# EAGLE board LSM9DS0_Breakout_Board-panel4 (EAGLE 7.1.0), part 1 of 2
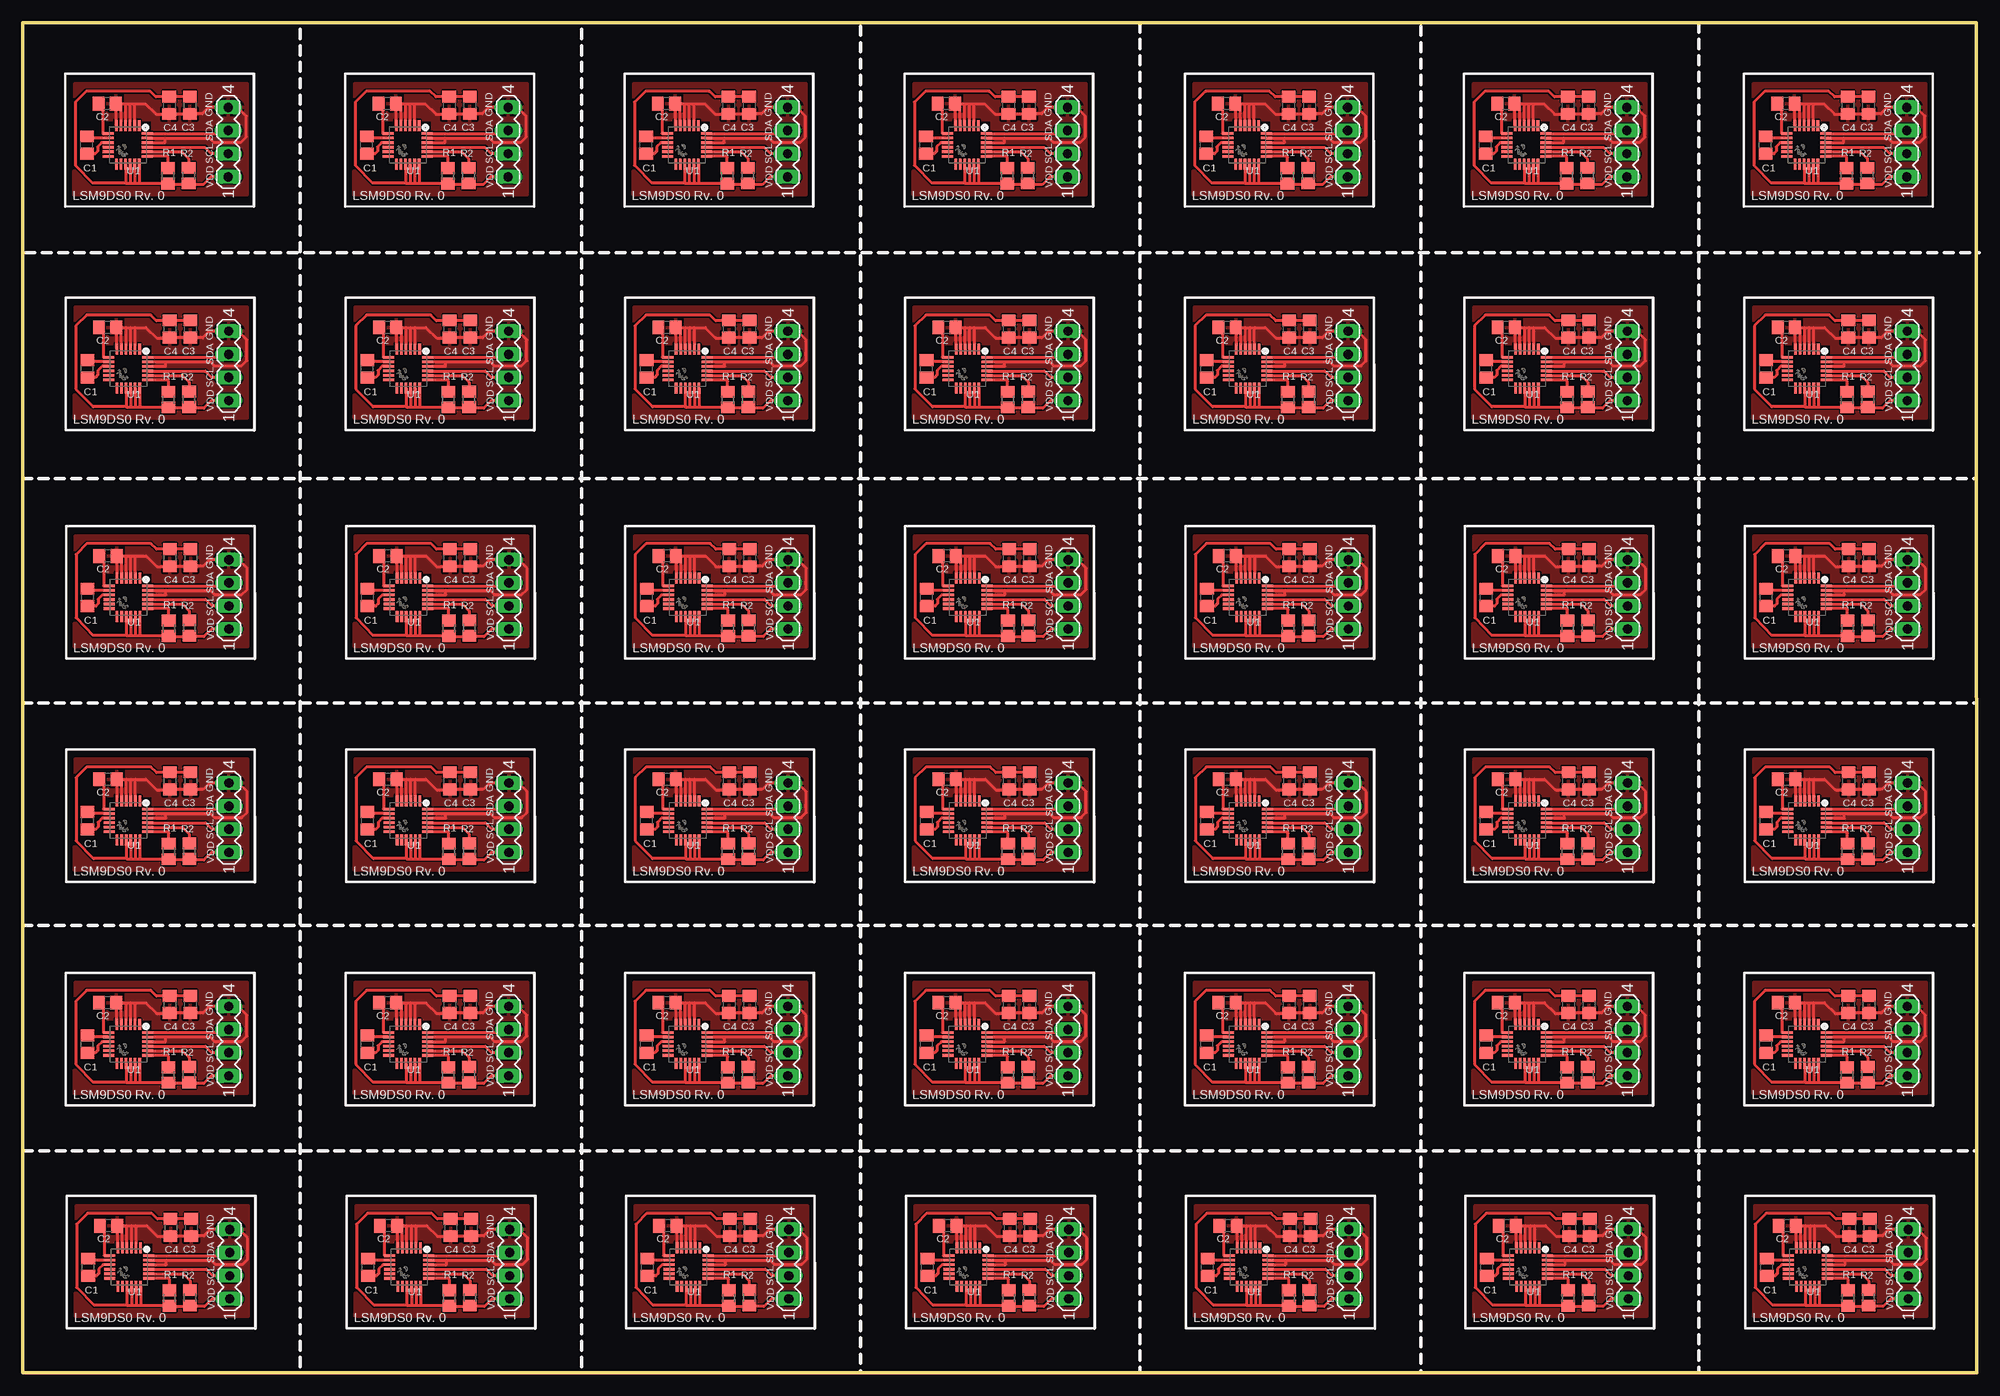
[diagram p0: board, top side]

Size 214.5 x 148.23 mm. Coordinates in mm from the lower left corner, seen from the top.
Outline: 0,148.23 214.48,148.23 214.5,0 0,0 0,148.23
Copper layers (1*16): Top 0.035559375mm / dielectric 1.501140625mm / Bottom 0.035559375mm
Design rules "4pcb-33board *": minimum track width 8mil, minimum drill 15mil, track to track 6mil, track to pad 6mil, pad to pad 6mil, via to via 6mil, smd to smd 6mil, copper to edge 10mil, drill to drill 10mil, minimum pad ring 10mil, minimum via ring 8mil, stop-mask expansion 4mil, vias tented up to drill 0mil, thermal gap 10mil
Net classes: 1 RFSIG: width 0.457 mm, clearance 0.205 mm to class 0, clearance 0.205 mm
bRestrict: area 10.2,10.1 to 13.2,13.1; area 10.1,34.5 to 13.1,37.6; area 10.1,59.1 to 13.1,62.2; area 10.1,83.6 to 13.1,86.7; area 10.1,108.7 to 13.1,111.8; area 10.1,133.2 to 13,136.3; area 40.9,10.1 to 43.9,13.1; area 40.8,34.5 to 43.8,37.6; area 40.9,59.1 to 43.8,62.2; area 40.9,83.6 to 43.8,86.7; area 40.8,108.7 to 43.8,111.8; area 40.8,133.2 to 43.7,136.3; 30 more areas

## Footprints (pad centres in the part's own frame; a part is rotated, then mirrored left to right if it is on the bottom)
C0805 = smd 1.3 x 1.5: 1 -0.95,0; 2 0.95,0
R0805 = smd 1.3 x 1.5: 1 -0.85,0; 2 0.85,0
MA04-1 = drill 1.016 long: 1 -3.81,0; 2 -1.27,0; 3 1.27,0; 4 3.81,0
LGA-24 = smd 1.208 x 0.29: 1 -2.129,1.25; 2 -2.129,0.75; 3 -2.129,0.25; 4 -2.129,-0.25; 5 -2.129,-0.75; 6 -2.129,-1.25; 13 2.129,-1.25; 14 2.129,-0.75; 15 2.129,-0.25; 16 2.129,0.25; 17 2.129,0.75; 18 2.129,1.25 | smd 0.29 x 1.208: 7 -1.25,-2.129; 8 -0.75,-2.129; 9 -0.25,-2.129; 10 0.25,-2.129; 11 0.75,-2.129; 12 1.25,-2.129; 19 1.25,2.129; 20 0.75,2.129; 21 0.25,2.129; 22 -0.25,2.129; 23 -0.75,2.129; 24 -1.25,2.129

## Placement (x,y rotation side)
C1  0.22uF  [C0805]  7.19,11.61 90 top
C2  4.7uF  [C0805]  9.42,16.15 180 top
C3  10uF  [C0805]  18.49,15.98 270 top
C4  100nF  [C0805]  16.23,15.98 270 top
C5  100nF  [C0805]  16.13,40.46 270 top
C6  10uF  [C0805]  18.39,40.46 270 top
C7  0.22uF  [C0805]  7.09,36.09 90 top
C8  4.7uF  [C0805]  9.32,40.64 180 top
C9  100nF  [C0805]  16.15,65 270 top
C10  10uF  [C0805]  18.41,65 270 top
C11  0.22uF  [C0805]  7.11,60.63 90 top
C12  4.7uF  [C0805]  9.35,65.18 180 top
C13  100nF  [C0805]  46.96,15.98 270 top
C14  10uF  [C0805]  49.23,15.98 270 top
C15  0.22uF  [C0805]  37.92,11.61 90 top
C16  4.7uF  [C0805]  40.16,16.15 180 top
C17  100nF  [C0805]  16.15,89.51 270 top
C18  10uF  [C0805]  18.41,89.51 270 top
C19  0.22uF  [C0805]  7.11,85.14 90 top
C20  4.7uF  [C0805]  9.35,89.69 180 top
C21  100nF  [C0805]  16.13,114.6 270 top
C22  10uF  [C0805]  18.39,114.6 270 top
C23  0.22uF  [C0805]  7.09,110.24 90 top
C24  4.7uF  [C0805]  9.32,114.78 180 top
C25  100nF  [C0805]  46.86,40.46 270 top
C26  10uF  [C0805]  49.12,40.46 270 top
C27  0.22uF  [C0805]  37.82,36.09 90 top
C28  4.7uF  [C0805]  40.06,40.64 180 top
C29  100nF  [C0805]  46.89,65 270 top
C30  10uF  [C0805]  49.15,65 270 top
C31  0.22uF  [C0805]  37.85,60.63 90 top
C32  4.7uF  [C0805]  40.08,65.18 180 top
C33  100nF  [C0805]  46.89,89.51 270 top
C34  10uF  [C0805]  49.15,89.51 270 top
C35  0.22uF  [C0805]  37.85,85.14 90 top
C36  4.7uF  [C0805]  40.08,89.69 180 top
C37  100nF  [C0805]  46.86,114.6 270 top
C38  10uF  [C0805]  49.12,114.6 270 top
C39  0.22uF  [C0805]  37.82,110.24 90 top
C40  4.7uF  [C0805]  40.06,114.78 180 top
C41  100nF  [C0805]  46.81,139.17 270 top
C42  10uF  [C0805]  49.07,139.17 270 top
C43  0.22uF  [C0805]  37.77,134.8 90 top
C44  4.7uF  [C0805]  40.01,139.34 180 top
C45  100nF  [C0805]  77.62,15.98 270 top
C46  10uF  [C0805]  79.88,15.98 270 top
C47  0.22uF  [C0805]  68.58,11.61 90 top
C48  4.7uF  [C0805]  70.82,16.15 180 top
C49  100nF  [C0805]  77.52,40.46 270 top
C50  10uF  [C0805]  79.78,40.46 270 top
C51  0.22uF  [C0805]  68.48,36.09 90 top
C52  4.7uF  [C0805]  70.71,40.64 180 top
C53  100nF  [C0805]  77.55,65 270 top
C54  10uF  [C0805]  79.81,65 270 top
C55  0.22uF  [C0805]  68.5,60.63 90 top
C56  4.7uF  [C0805]  70.74,65.18 180 top
C57  100nF  [C0805]  77.55,89.51 270 top
C58  10uF  [C0805]  79.81,89.51 270 top
C59  0.22uF  [C0805]  68.5,85.14 90 top
C60  4.7uF  [C0805]  70.74,89.69 180 top
C61  100nF  [C0805]  16.08,139.17 270 top
C62  10uF  [C0805]  18.34,139.17 270 top
C63  0.22uF  [C0805]  7.04,134.8 90 top
C64  4.7uF  [C0805]  9.27,139.34 180 top
C65  100nF  [C0805]  77.52,114.6 270 top
C66  10uF  [C0805]  79.78,114.6 270 top
C67  0.22uF  [C0805]  68.48,110.24 90 top
C68  4.7uF  [C0805]  70.71,114.78 180 top
C69  100nF  [C0805]  77.47,139.17 270 top
C70  10uF  [C0805]  79.73,139.17 270 top
C71  0.22uF  [C0805]  68.43,134.8 90 top
C72  4.7uF  [C0805]  70.66,139.34 180 top
C73  100nF  [C0805]  108.36,15.98 270 top
C74  10uF  [C0805]  110.62,15.98 270 top
C75  0.22uF  [C0805]  99.31,11.61 90 top
C76  4.7uF  [C0805]  101.55,16.15 180 top
C77  100nF  [C0805]  108.25,40.46 270 top
C78  10uF  [C0805]  110.52,40.46 270 top
C79  0.22uF  [C0805]  99.21,36.09 90 top
C80  4.7uF  [C0805]  101.45,40.64 180 top
C81  100nF  [C0805]  108.28,65 270 top
C82  10uF  [C0805]  110.54,65 270 top
C83  0.22uF  [C0805]  99.24,60.63 90 top
C84  4.7uF  [C0805]  101.47,65.18 180 top
C85  100nF  [C0805]  108.28,89.51 270 top
C86  10uF  [C0805]  110.54,89.51 270 top
C87  0.22uF  [C0805]  99.24,85.14 90 top
C88  4.7uF  [C0805]  101.47,89.69 180 top
C89  100nF  [C0805]  108.25,114.6 270 top
C90  10uF  [C0805]  110.52,114.6 270 top
C91  0.22uF  [C0805]  99.21,110.24 90 top
C92  4.7uF  [C0805]  101.45,114.78 180 top
C93  100nF  [C0805]  108.2,139.17 270 top
C94  10uF  [C0805]  110.46,139.17 270 top
C95  0.22uF  [C0805]  99.16,134.8 90 top
C96  4.7uF  [C0805]  101.4,139.34 180 top
C97  100nF  [C0805]  139.12,15.98 270 top
C98  10uF  [C0805]  141.38,15.98 270 top
C99  0.22uF  [C0805]  130.07,11.61 90 top
C100  4.7uF  [C0805]  132.31,16.15 180 top
C101  100nF  [C0805]  139.01,40.46 270 top
C102  10uF  [C0805]  141.27,40.46 270 top
C103  0.22uF  [C0805]  129.97,36.09 90 top
C104  4.7uF  [C0805]  132.21,40.64 180 top
C105  100nF  [C0805]  139.04,65 270 top
C106  10uF  [C0805]  141.3,65 270 top
C107  0.22uF  [C0805]  130,60.63 90 top
C108  4.7uF  [C0805]  132.23,65.18 180 top
C109  100nF  [C0805]  139.04,89.51 270 top
C110  10uF  [C0805]  141.3,89.51 270 top
C111  0.22uF  [C0805]  130,85.14 90 top
C112  4.7uF  [C0805]  132.23,89.69 180 top
C113  100nF  [C0805]  139.01,114.6 270 top
C114  10uF  [C0805]  141.27,114.6 270 top
C115  0.22uF  [C0805]  129.97,110.24 90 top
C116  4.7uF  [C0805]  132.21,114.78 180 top
C117  100nF  [C0805]  138.96,139.17 270 top
C118  10uF  [C0805]  141.22,139.17 270 top
C119  0.22uF  [C0805]  129.92,134.8 90 top
C120  4.7uF  [C0805]  132.16,139.34 180 top
C121  100nF  [C0805]  169.77,15.98 270 top
C122  10uF  [C0805]  172.03,15.98 270 top
C123  0.22uF  [C0805]  160.73,11.61 90 top
C124  4.7uF  [C0805]  162.97,16.15 180 top
C125  100nF  [C0805]  169.67,40.46 270 top
C126  10uF  [C0805]  171.93,40.46 270 top
C127  0.22uF  [C0805]  160.63,36.09 90 top
C128  4.7uF  [C0805]  162.86,40.64 180 top
C129  100nF  [C0805]  169.7,65 270 top
C130  10uF  [C0805]  171.96,65 270 top
C131  0.22uF  [C0805]  160.66,60.63 90 top
C132  4.7uF  [C0805]  162.89,65.18 180 top
C133  100nF  [C0805]  169.7,89.51 270 top
C134  10uF  [C0805]  171.96,89.51 270 top
C135  0.22uF  [C0805]  160.66,85.14 90 top
C136  4.7uF  [C0805]  162.89,89.69 180 top
C137  100nF  [C0805]  169.67,114.6 270 top
C138  10uF  [C0805]  171.93,114.6 270 top
C139  0.22uF  [C0805]  160.63,110.24 90 top
C140  4.7uF  [C0805]  162.86,114.78 180 top
C141  100nF  [C0805]  169.62,139.17 270 top
C142  10uF  [C0805]  171.88,139.17 270 top
C143  0.22uF  [C0805]  160.58,134.8 90 top
C144  4.7uF  [C0805]  162.81,139.34 180 top
C145  100nF  [C0805]  200.51,15.98 270 top
C146  10uF  [C0805]  202.77,15.98 270 top
C147  0.22uF  [C0805]  191.47,11.61 90 top
C148  4.7uF  [C0805]  193.7,16.15 180 top
C149  100nF  [C0805]  200.41,40.46 270 top
C150  10uF  [C0805]  202.67,40.46 270 top
C151  0.22uF  [C0805]  191.36,36.09 90 top
C152  4.7uF  [C0805]  193.6,40.64 180 top
C153  100nF  [C0805]  200.43,65 270 top
C154  10uF  [C0805]  202.69,65 270 top
C155  0.22uF  [C0805]  191.39,60.63 90 top
C156  4.7uF  [C0805]  193.62,65.18 180 top
C157  100nF  [C0805]  200.43,89.51 270 top
C158  10uF  [C0805]  202.69,89.51 270 top
C159  0.22uF  [C0805]  191.39,85.14 90 top
C160  4.7uF  [C0805]  193.62,89.69 180 top
C161  100nF  [C0805]  200.41,114.6 270 top
C162  10uF  [C0805]  202.67,114.6 270 top
C163  0.22uF  [C0805]  191.36,110.24 90 top
C164  4.7uF  [C0805]  193.6,114.78 180 top
C165  100nF  [C0805]  200.36,139.17 270 top
C166  10uF  [C0805]  202.62,139.17 270 top
C167  0.22uF  [C0805]  191.31,134.8 90 top
C168  4.7uF  [C0805]  193.55,139.34 180 top
R1  10k  [R0805]  16.1,8.23 270 top
R2  10k  [R0805]  18.36,8.25 270 top
R3  10k  [R0805]  16,32.72 270 top
R4  10k  [R0805]  18.26,32.74 270 top
R5  10k  [R0805]  16.03,57.25 270 top
R6  10k  [R0805]  18.29,57.28 270 top
R7  10k  [R0805]  46.84,8.23 270 top
R8  10k  [R0805]  49.1,8.25 270 top
R9  10k  [R0805]  16.03,81.76 270 top
R10  10k  [R0805]  18.29,81.79 270 top
R11  10k  [R0805]  16,106.86 270 top
R12  10k  [R0805]  18.26,106.88 270 top
R13  10k  [R0805]  46.74,32.72 270 top
R14  10k  [R0805]  49,32.74 270 top
R15  10k  [R0805]  46.76,57.25 270 top
R16  10k  [R0805]  49.02,57.28 270 top
R17  10k  [R0805]  46.76,81.76 270 top
R18  10k  [R0805]  49.02,81.79 270 top
R19  10k  [R0805]  46.74,106.86 270 top
R20  10k  [R0805]  49,106.88 270 top
R21  10k  [R0805]  46.69,131.42 270 top
R22  10k  [R0805]  48.95,131.44 270 top
R23  10k  [R0805]  77.5,8.23 270 top
R24  10k  [R0805]  79.76,8.25 270 top
R25  10k  [R0805]  77.39,32.72 270 top
R26  10k  [R0805]  79.65,32.74 270 top
R27  10k  [R0805]  77.42,57.25 270 top
R28  10k  [R0805]  79.68,57.28 270 top
R29  10k  [R0805]  77.42,81.76 270 top
R30  10k  [R0805]  79.68,81.79 270 top
R31  10k  [R0805]  15.95,131.42 270 top
R32  10k  [R0805]  18.21,131.44 270 top
R33  10k  [R0805]  77.39,106.86 270 top
R34  10k  [R0805]  79.65,106.88 270 top
R35  10k  [R0805]  77.34,131.42 270 top
R36  10k  [R0805]  79.6,131.44 270 top
R37  10k  [R0805]  108.23,8.23 270 top
R38  10k  [R0805]  110.49,8.25 270 top
R39  10k  [R0805]  108.13,32.72 270 top
R40  10k  [R0805]  110.39,32.74 270 top
R41  10k  [R0805]  108.15,57.25 270 top
R42  10k  [R0805]  110.41,57.28 270 top
R43  10k  [R0805]  108.15,81.76 270 top
R44  10k  [R0805]  110.41,81.79 270 top
R45  10k  [R0805]  108.13,106.86 270 top
R46  10k  [R0805]  110.39,106.88 270 top
R47  10k  [R0805]  108.08,131.42 270 top
R48  10k  [R0805]  110.34,131.44 270 top
R49  10k  [R0805]  138.99,8.23 270 top
R50  10k  [R0805]  141.25,8.25 270 top
R51  10k  [R0805]  138.89,32.72 270 top
R52  10k  [R0805]  141.15,32.74 270 top
R53  10k  [R0805]  138.91,57.25 270 top
R54  10k  [R0805]  141.17,57.28 270 top
R55  10k  [R0805]  138.91,81.76 270 top
R56  10k  [R0805]  141.17,81.79 270 top
R57  10k  [R0805]  138.89,106.86 270 top
R58  10k  [R0805]  141.15,106.88 270 top
R59  10k  [R0805]  138.84,131.42 270 top
R60  10k  [R0805]  141.1,131.44 270 top
R61  10k  [R0805]  169.65,8.23 270 top
R62  10k  [R0805]  171.91,8.25 270 top
R63  10k  [R0805]  169.54,32.72 270 top
R64  10k  [R0805]  171.81,32.74 270 top
R65  10k  [R0805]  169.57,57.25 270 top
R66  10k  [R0805]  171.83,57.28 270 top
R67  10k  [R0805]  169.57,81.76 270 top
R68  10k  [R0805]  171.83,81.79 270 top
R69  10k  [R0805]  169.54,106.86 270 top
R70  10k  [R0805]  171.81,106.88 270 top
R71  10k  [R0805]  169.49,131.42 270 top
R72  10k  [R0805]  171.75,131.44 270 top
R73  10k  [R0805]  200.38,8.23 270 top
R74  10k  [R0805]  202.64,8.25 270 top
R75  10k  [R0805]  200.28,32.72 270 top
R76  10k  [R0805]  202.54,32.74 270 top
R77  10k  [R0805]  200.3,57.25 270 top
R78  10k  [R0805]  202.56,57.28 270 top
R79  10k  [R0805]  200.3,81.76 270 top
R80  10k  [R0805]  202.56,81.79 270 top
R81  10k  [R0805]  200.28,106.86 270 top
R82  10k  [R0805]  202.54,106.88 270 top
R83  10k  [R0805]  200.23,131.42 270 top
R84  10k  [R0805]  202.49,131.44 270 top
SV1  JP1  [MA04-1]  22.71,11.94 90 top
SV2  JP1  [MA04-1]  22.61,36.42 90 top
SV3  JP1  [MA04-1]  22.63,60.96 90 top
SV4  JP1  [MA04-1]  53.44,11.94 90 top
SV5  JP1  [MA04-1]  22.63,85.47 90 top
SV6  JP1  [MA04-1]  22.61,110.57 90 top
SV7  JP1  [MA04-1]  53.34,36.42 90 top
SV8  JP1  [MA04-1]  53.37,60.96 90 top
SV9  JP1  [MA04-1]  53.37,85.47 90 top
SV10  JP1  [MA04-1]  53.34,110.57 90 top
SV11  JP1  [MA04-1]  53.29,135.13 90 top
SV12  JP1  [MA04-1]  84.1,11.94 90 top
SV13  JP1  [MA04-1]  84,36.42 90 top
SV14  JP1  [MA04-1]  84.02,60.96 90 top
SV15  JP1  [MA04-1]  84.02,85.47 90 top
SV16  JP1  [MA04-1]  22.56,135.13 90 top
SV17  JP1  [MA04-1]  84,110.57 90 top
SV18  JP1  [MA04-1]  83.95,135.13 90 top
SV19  JP1  [MA04-1]  114.83,11.94 90 top
SV20  JP1  [MA04-1]  114.73,36.42 90 top
SV21  JP1  [MA04-1]  114.76,60.96 90 top
SV22  JP1  [MA04-1]  114.76,85.47 90 top
SV23  JP1  [MA04-1]  114.73,110.57 90 top
SV24  JP1  [MA04-1]  114.68,135.13 90 top
SV25  JP1  [MA04-1]  145.59,11.94 90 top
SV26  JP1  [MA04-1]  145.49,36.42 90 top
SV27  JP1  [MA04-1]  145.52,60.96 90 top
SV28  JP1  [MA04-1]  145.52,85.47 90 top
SV29  JP1  [MA04-1]  145.49,110.57 90 top
SV30  JP1  [MA04-1]  145.44,135.13 90 top
SV31  JP1  [MA04-1]  176.25,11.94 90 top
SV32  JP1  [MA04-1]  176.15,36.42 90 top
SV33  JP1  [MA04-1]  176.17,60.96 90 top
SV34  JP1  [MA04-1]  176.17,85.47 90 top
SV35  JP1  [MA04-1]  176.15,110.57 90 top
SV36  JP1  [MA04-1]  176.1,135.13 90 top
SV37  JP1  [MA04-1]  206.98,11.94 90 top
SV38  JP1  [MA04-1]  206.88,36.42 90 top
SV39  JP1  [MA04-1]  206.91,60.96 90 top
SV40  JP1  [MA04-1]  206.91,85.47 90 top
SV41  JP1  [MA04-1]  206.88,110.57 90 top
SV42  JP1  [MA04-1]  206.83,135.13 90 top
U1  LSM9DS0  [LGA-24]  11.68,11.63 270 top
U2  LSM9DS0  [LGA-24]  11.58,36.12 270 top
U3  LSM9DS0  [LGA-24]  11.61,60.66 270 top
U4  LSM9DS0  [LGA-24]  42.42,11.63 270 top
U5  LSM9DS0  [LGA-24]  11.61,85.17 270 top
U6  LSM9DS0  [LGA-24]  11.58,110.26 270 top
U7  LSM9DS0  [LGA-24]  42.32,36.12 270 top
U8  LSM9DS0  [LGA-24]  42.34,60.66 270 top
U9  LSM9DS0  [LGA-24]  42.34,85.17 270 top
U10  LSM9DS0  [LGA-24]  42.32,110.26 270 top
U11  LSM9DS0  [LGA-24]  42.27,134.82 270 top
U12  LSM9DS0  [LGA-24]  73.08,11.63 270 top
U13  LSM9DS0  [LGA-24]  72.97,36.12 270 top
U14  LSM9DS0  [LGA-24]  73,60.66 270 top
U15  LSM9DS0  [LGA-24]  73,85.17 270 top
U16  LSM9DS0  [LGA-24]  11.53,134.82 270 top
U17  LSM9DS0  [LGA-24]  72.97,110.26 270 top
U18  LSM9DS0  [LGA-24]  72.92,134.82 270 top
U19  LSM9DS0  [LGA-24]  103.81,11.63 270 top
U20  LSM9DS0  [LGA-24]  103.71,36.12 270 top
U21  LSM9DS0  [LGA-24]  103.73,60.66 270 top
U22  LSM9DS0  [LGA-24]  103.73,85.17 270 top
U23  LSM9DS0  [LGA-24]  103.71,110.26 270 top
U24  LSM9DS0  [LGA-24]  103.66,134.82 270 top
U25  LSM9DS0  [LGA-24]  134.57,11.63 270 top
U26  LSM9DS0  [LGA-24]  134.47,36.12 270 top
U27  LSM9DS0  [LGA-24]  134.49,60.66 270 top
U28  LSM9DS0  [LGA-24]  134.49,85.17 270 top
U29  LSM9DS0  [LGA-24]  134.47,110.26 270 top
U30  LSM9DS0  [LGA-24]  134.42,134.82 270 top
U31  LSM9DS0  [LGA-24]  165.23,11.63 270 top
U32  LSM9DS0  [LGA-24]  165.13,36.12 270 top
U33  LSM9DS0  [LGA-24]  165.15,60.66 270 top
U34  LSM9DS0  [LGA-24]  165.15,85.17 270 top
U35  LSM9DS0  [LGA-24]  165.13,110.26 270 top
U36  LSM9DS0  [LGA-24]  165.07,134.82 270 top
U37  LSM9DS0  [LGA-24]  195.96,11.63 270 top
U38  LSM9DS0  [LGA-24]  195.86,36.12 270 top
U39  LSM9DS0  [LGA-24]  195.88,60.66 270 top
U40  LSM9DS0  [LGA-24]  195.88,85.17 270 top
U41  LSM9DS0  [LGA-24]  195.86,110.26 270 top
U42  LSM9DS0  [LGA-24]  195.81,134.82 270 top

## Library data of the parts
C1-C168 = rcl
R1-R84 = resistor
SV1-SV42 = con-lstb; OC_FARNELL: unknown; OC_NEWARK: unknown
U1-U42 = Controller

## Nets
GND: C2.1 C3.2 C4.2 SV1.4 U1.2 U1.3 U1.4 U1.5 U1.6 U1.22 U1.23
GND1: C5.2 C6.2 C8.1 SV2.4 U2.2 U2.3 U2.4 U2.5 U2.6 U2.22 U2.23
GND2: C9.2 C10.2 C12.1 SV3.4 U3.2 U3.3 U3.4 U3.5 U3.6 U3.22 U3.23
GND3: C13.2 C14.2 C16.1 SV4.4 U4.2 U4.3 U4.4 U4.5 U4.6 U4.22 U4.23
GND4: C17.2 C18.2 C20.1 SV5.4 U5.2 U5.3 U5.4 U5.5 U5.6 U5.22 U5.23
GND5: C21.2 C22.2 C24.1 SV6.4 U6.2 U6.3 U6.4 U6.5 U6.6 U6.22 U6.23
GND6: C25.2 C26.2 C28.1 SV7.4 U7.2 U7.3 U7.4 U7.5 U7.6 U7.22 U7.23
GND7: C29.2 C30.2 C32.1 SV8.4 U8.2 U8.3 U8.4 U8.5 U8.6 U8.22 U8.23
GND8: C33.2 C34.2 C36.1 SV9.4 U9.2 U9.3 U9.4 U9.5 U9.6 U9.22 U9.23
GND9: C37.2 C38.2 C40.1 SV10.4 U10.2 U10.3 U10.4 U10.5 U10.6 U10.22 U10.23
GND10: C41.2 C42.2 C44.1 SV11.4 U11.2 U11.3 U11.4 U11.5 U11.6 U11.22 U11.23
GND11: C45.2 C46.2 C48.1 SV12.4 U12.2 U12.3 U12.4 U12.5 U12.6 U12.22 U12.23
GND12: C49.2 C50.2 C52.1 SV13.4 U13.2 U13.3 U13.4 U13.5 U13.6 U13.22 U13.23
GND13: C53.2 C54.2 C56.1 SV14.4 U14.2 U14.3 U14.4 U14.5 U14.6 U14.22 U14.23
GND14: C57.2 C58.2 C60.1 SV15.4 U15.2 U15.3 U15.4 U15.5 U15.6 U15.22 U15.23
GND15: C61.2 C62.2 C64.1 SV16.4 U16.2 U16.3 U16.4 U16.5 U16.6 U16.22 U16.23
GND16: C65.2 C66.2 C68.1 SV17.4 U17.2 U17.3 U17.4 U17.5 U17.6 U17.22 U17.23
GND17: C69.2 C70.2 C72.1 SV18.4 U18.2 U18.3 U18.4 U18.5 U18.6 U18.22 U18.23
GND18: C73.2 C74.2 C76.1 SV19.4 U19.2 U19.3 U19.4 U19.5 U19.6 U19.22 U19.23
GND19: C77.2 C78.2 C80.1 SV20.4 U20.2 U20.3 U20.4 U20.5 U20.6 U20.22 U20.23
GND20: C81.2 C82.2 C84.1 SV21.4 U21.2 U21.3 U21.4 U21.5 U21.6 U21.22 U21.23
GND21: C85.2 C86.2 C88.1 SV22.4 U22.2 U22.3 U22.4 U22.5 U22.6 U22.22 U22.23
GND22: C89.2 C90.2 C92.1 SV23.4 U23.2 U23.3 U23.4 U23.5 U23.6 U23.22 U23.23
GND23: C93.2 C94.2 C96.1 SV24.4 U24.2 U24.3 U24.4 U24.5 U24.6 U24.22 U24.23
GND24: C97.2 C98.2 C100.1 SV25.4 U25.2 U25.3 U25.4 U25.5 U25.6 U25.22 U25.23
GND25: C101.2 C102.2 C104.1 SV26.4 U26.2 U26.3 U26.4 U26.5 U26.6 U26.22 U26.23
GND26: C105.2 C106.2 C108.1 SV27.4 U27.2 U27.3 U27.4 U27.5 U27.6 U27.22 U27.23
GND27: C109.2 C110.2 C112.1 SV28.4 U28.2 U28.3 U28.4 U28.5 U28.6 U28.22 U28.23
GND28: C113.2 C114.2 C116.1 SV29.4 U29.2 U29.3 U29.4 U29.5 U29.6 U29.22 U29.23
GND29: C117.2 C118.2 C120.1 SV30.4 U30.2 U30.3 U30.4 U30.5 U30.6 U30.22 U30.23
GND30: C121.2 C122.2 C124.1 SV31.4 U31.2 U31.3 U31.4 U31.5 U31.6 U31.22 U31.23
GND31: C125.2 C126.2 C128.1 SV32.4 U32.2 U32.3 U32.4 U32.5 U32.6 U32.22 U32.23
GND32: C129.2 C130.2 C132.1 SV33.4 U33.2 U33.3 U33.4 U33.5 U33.6 U33.22 U33.23
GND33: C133.2 C134.2 C136.1 SV34.4 U34.2 U34.3 U34.4 U34.5 U34.6 U34.22 U34.23
GND34: C137.2 C138.2 C140.1 SV35.4 U35.2 U35.3 U35.4 U35.5 U35.6 U35.22 U35.23
GND35: C141.2 C142.2 C144.1 SV36.4 U36.2 U36.3 U36.4 U36.5 U36.6 U36.22 U36.23
GND36: C145.2 C146.2 C148.1 SV37.4 U37.2 U37.3 U37.4 U37.5 U37.6 U37.22 U37.23
GND37: C149.2 C150.2 C152.1 SV38.4 U38.2 U38.3 U38.4 U38.5 U38.6 U38.22 U38.23
GND38: C153.2 C154.2 C156.1 SV39.4 U39.2 U39.3 U39.4 U39.5 U39.6 U39.22 U39.23
GND39: C157.2 C158.2 C160.1 SV40.4 U40.2 U40.3 U40.4 U40.5 U40.6 U40.22 U40.23
GND40: C161.2 C162.2 C164.1 SV41.4 U41.2 U41.3 U41.4 U41.5 U41.6 U41.22 U41.23
GND41: C165.2 C166.2 C168.1 SV42.4 U42.2 U42.3 U42.4 U42.5 U42.6 U42.22 U42.23
N$1: C8.2 U2.7
N$2: C7.2 U2.8
N$3: C7.1 U2.9
N$4: R3.1 U2.19
N$5: R4.1 U2.20
N$6: C12.2 U3.7
N$7: C11.2 U3.8
N$8: C11.1 U3.9
N$9: R5.1 U3.19
N$10: R6.1 U3.20
N$11: C16.2 U4.7
N$12: C15.2 U4.8
N$13: C15.1 U4.9
N$14: R7.1 U4.19
N$15: R8.1 U4.20
N$16: C20.2 U5.7
N$17: C19.2 U5.8
N$18: C19.1 U5.9
N$19: R9.1 U5.19
N$20: C2.2 U1.7
N$21: C1.2 U1.8
N$22: C1.1 U1.9
N$23: R1.1 U1.19
N$24: R2.1 U1.20
N$25: R10.1 U5.20
N$26: C24.2 U6.7
N$27: C23.2 U6.8
N$28: C23.1 U6.9
N$29: R11.1 U6.19
N$30: R12.1 U6.20
N$31: C28.2 U7.7
N$32: C27.2 U7.8
N$33: C27.1 U7.9
N$34: R13.1 U7.19
N$35: R14.1 U7.20
N$36: C32.2 U8.7
N$37: C31.2 U8.8
N$38: C31.1 U8.9
N$39: R15.1 U8.19
N$40: R16.1 U8.20
N$41: C36.2 U9.7
N$42: C35.2 U9.8
N$43: C35.1 U9.9
N$44: R17.1 U9.19
N$45: R18.1 U9.20
N$46: C40.2 U10.7
N$47: C39.2 U10.8
N$48: C39.1 U10.9
N$49: R19.1 U10.19
N$50: R20.1 U10.20
N$51: C44.2 U11.7
N$52: C43.2 U11.8
N$53: C43.1 U11.9
N$54: R21.1 U11.19
N$55: R22.1 U11.20
N$56: C48.2 U12.7
N$57: C47.2 U12.8
N$58: C47.1 U12.9
N$59: R23.1 U12.19
N$60: R24.1 U12.20
N$61: C52.2 U13.7
N$62: C51.2 U13.8
N$63: C51.1 U13.9
N$64: R25.1 U13.19
N$65: R26.1 U13.20
N$66: C56.2 U14.7
N$67: C55.2 U14.8
N$68: C55.1 U14.9
N$69: R27.1 U14.19
N$70: R28.1 U14.20
N$71: C60.2 U15.7
N$72: C59.2 U15.8
N$73: C59.1 U15.9
N$74: R29.1 U15.19
N$75: R30.1 U15.20
N$76: C64.2 U16.7
N$77: C63.2 U16.8
N$78: C63.1 U16.9
N$79: R31.1 U16.19
N$80: R32.1 U16.20
N$81: C68.2 U17.7
N$82: C67.2 U17.8
N$83: C67.1 U17.9
N$84: R33.1 U17.19
N$85: R34.1 U17.20
N$86: C72.2 U18.7
N$87: C71.2 U18.8
N$88: C71.1 U18.9
N$89: R35.1 U18.19
N$90: R36.1 U18.20
N$91: C76.2 U19.7
N$92: C75.2 U19.8
N$93: C75.1 U19.9
N$94: R37.1 U19.19
N$95: R38.1 U19.20
N$96: C80.2 U20.7
N$97: C79.2 U20.8
N$98: C79.1 U20.9
N$99: R39.1 U20.19
N$100: R40.1 U20.20
N$101: C84.2 U21.7
N$102: C83.2 U21.8
N$103: C83.1 U21.9
N$104: R41.1 U21.19
N$105: R42.1 U21.20
N$106: C88.2 U22.7
N$107: C87.2 U22.8
N$108: C87.1 U22.9
N$109: R43.1 U22.19
N$110: R44.1 U22.20
N$111: C92.2 U23.7
N$112: C91.2 U23.8
N$113: C91.1 U23.9
N$114: R45.1 U23.19
N$115: R46.1 U23.20
N$116: C96.2 U24.7
N$117: C95.2 U24.8
N$118: C95.1 U24.9
N$119: R47.1 U24.19
N$120: R48.1 U24.20
N$121: C100.2 U25.7
N$122: C99.2 U25.8
N$123: C99.1 U25.9
N$124: R49.1 U25.19
N$125: R50.1 U25.20
N$126: C104.2 U26.7
N$127: C103.2 U26.8
N$128: C103.1 U26.9
N$129: R51.1 U26.19
N$130: R52.1 U26.20
N$131: C108.2 U27.7
N$132: C107.2 U27.8
N$133: C107.1 U27.9
N$134: R53.1 U27.19
N$135: R54.1 U27.20
N$136: C112.2 U28.7
N$137: C111.2 U28.8
N$138: C111.1 U28.9
N$139: R55.1 U28.19
N$140: R56.1 U28.20
N$141: C116.2 U29.7
N$142: C115.2 U29.8
N$143: C115.1 U29.9
N$144: R57.1 U29.19
N$145: R58.1 U29.20
N$146: C120.2 U30.7
N$147: C119.2 U30.8
N$148: C119.1 U30.9
N$149: R59.1 U30.19
N$150: R60.1 U30.20
N$151: C124.2 U31.7
N$152: C123.2 U31.8
N$153: C123.1 U31.9
N$154: R61.1 U31.19
N$155: R62.1 U31.20
N$156: C128.2 U32.7
N$157: C127.2 U32.8
N$158: C127.1 U32.9
N$159: R63.1 U32.19
N$160: R64.1 U32.20
N$161: C132.2 U33.7
N$162: C131.2 U33.8
N$163: C131.1 U33.9
N$164: R65.1 U33.19
N$165: R66.1 U33.20
N$166: C136.2 U34.7
N$167: C135.2 U34.8
N$168: C135.1 U34.9
N$169: R67.1 U34.19
N$170: R68.1 U34.20
N$171: C140.2 U35.7
N$172: C139.2 U35.8
N$173: C139.1 U35.9
N$174: R69.1 U35.19
N$175: R70.1 U35.20
N$176: C144.2 U36.7
N$177: C143.2 U36.8
N$178: C143.1 U36.9
N$179: R71.1 U36.19
N$180: R72.1 U36.20
N$181: C148.2 U37.7
N$182: C147.2 U37.8
N$183: C147.1 U37.9
N$184: R73.1 U37.19
N$185: R74.1 U37.20
N$186: C152.2 U38.7
N$187: C151.2 U38.8
N$188: C151.1 U38.9
N$189: R75.1 U38.19
N$190: R76.1 U38.20
N$191: C156.2 U39.7
N$192: C155.2 U39.8
N$193: C155.1 U39.9
N$194: R77.1 U39.19
N$195: R78.1 U39.20
N$196: C160.2 U40.7
N$197: C159.2 U40.8
N$198: C159.1 U40.9
N$199: R79.1 U40.19
N$200: R80.1 U40.20
N$201: C164.2 U41.7
N$202: C163.2 U41.8
N$203: C163.1 U41.9
N$204: R81.1 U41.19
N$205: R82.1 U41.20
N$206: C168.2 U42.7
N$207: C167.2 U42.8
N$208: C167.1 U42.9
N$209: R83.1 U42.19
N$210: R84.1 U42.20
SCL: SV1.2 U1.21
SCL1: SV2.2 U2.21
SCL2: SV3.2 U3.21
SCL3: SV4.2 U4.21
SCL4: SV5.2 U5.21
SCL5: SV6.2 U6.21
SCL6: SV7.2 U7.21
SCL7: SV8.2 U8.21
SCL8: SV9.2 U9.21
SCL9: SV10.2 U10.21
SCL10: SV11.2 U11.21
SCL11: SV12.2 U12.21
SCL12: SV13.2 U13.21
SCL13: SV14.2 U14.21
SCL14: SV15.2 U15.21
SCL15: SV16.2 U16.21
SCL16: SV17.2 U17.21
SCL17: SV18.2 U18.21
SCL18: SV19.2 U19.21
SCL19: SV20.2 U20.21
SCL20: SV21.2 U21.21
SCL21: SV22.2 U22.21
SCL22: SV23.2 U23.21
SCL23: SV24.2 U24.21
SCL24: SV25.2 U25.21
SCL25: SV26.2 U26.21
SCL26: SV27.2 U27.21
SCL27: SV28.2 U28.21
SCL28: SV29.2 U29.21
SCL29: SV30.2 U30.21
SCL30: SV31.2 U31.21
SCL31: SV32.2 U32.21
SCL32: SV33.2 U33.21
SCL33: SV34.2 U34.21
SCL34: SV35.2 U35.21
SCL35: SV36.2 U36.21
SCL36: SV37.2 U37.21
SCL37: SV38.2 U38.21
SCL38: SV39.2 U39.21
SCL39: SV40.2 U40.21
SCL40: SV41.2 U41.21
SCL41: SV42.2 U42.21
SDA: SV1.3 U1.24
SDA1: SV2.3 U2.24
SDA2: SV3.3 U3.24
SDA3: SV4.3 U4.24
SDA4: SV5.3 U5.24
SDA5: SV6.3 U6.24
SDA6: SV7.3 U7.24
SDA7: SV8.3 U8.24
SDA8: SV9.3 U9.24
SDA9: SV10.3 U10.24
SDA10: SV11.3 U11.24
SDA11: SV12.3 U12.24
SDA12: SV13.3 U13.24
SDA13: SV14.3 U14.24
SDA14: SV15.3 U15.24
SDA15: SV16.3 U16.24
SDA16: SV17.3 U17.24
SDA17: SV18.3 U18.24
SDA18: SV19.3 U19.24
SDA19: SV20.3 U20.24
SDA20: SV21.3 U21.24
SDA21: SV22.3 U22.24
SDA22: SV23.3 U23.24
SDA23: SV24.3 U24.24
SDA24: SV25.3 U25.24
SDA25: SV26.3 U26.24
SDA26: SV27.3 U27.24
SDA27: SV28.3 U28.24
SDA28: SV29.3 U29.24
SDA29: SV30.3 U30.24
SDA30: SV31.3 U31.24
SDA31: SV32.3 U32.24
SDA32: SV33.3 U33.24
SDA33: SV34.3 U34.24
SDA34: SV35.3 U35.24
SDA35: SV36.3 U36.24
SDA36: SV37.3 U37.24
SDA37: SV38.3 U38.24
SDA38: SV39.3 U39.24
SDA39: SV40.3 U40.24
SDA40: SV41.3 U41.24
SDA41: SV42.3 U42.24
VDD: C3.1 C4.1 R1.2 R2.2 SV1.1 U1.15 U1.16 U1.17 U1.18
VDD1: C5.1 C6.1 R3.2 R4.2 SV2.1 U2.15 U2.16 U2.17 U2.18
VDD2: C9.1 C10.1 R5.2 R6.2 SV3.1 U3.15 U3.16 U3.17 U3.18
VDD3: C13.1 C14.1 R7.2 R8.2 SV4.1 U4.15 U4.16 U4.17 U4.18
VDD4: C17.1 C18.1 R9.2 R10.2 SV5.1 U5.15 U5.16 U5.17 U5.18
VDD5: C21.1 C22.1 R11.2 R12.2 SV6.1 U6.15 U6.16 U6.17 U6.18
VDD6: C25.1 C26.1 R13.2 R14.2 SV7.1 U7.15 U7.16 U7.17 U7.18
VDD7: C29.1 C30.1 R15.2 R16.2 SV8.1 U8.15 U8.16 U8.17 U8.18
VDD8: C33.1 C34.1 R17.2 R18.2 SV9.1 U9.15 U9.16 U9.17 U9.18
VDD9: C37.1 C38.1 R19.2 R20.2 SV10.1 U10.15 U10.16 U10.17 U10.18
VDD10: C41.1 C42.1 R21.2 R22.2 SV11.1 U11.15 U11.16 U11.17 U11.18
VDD11: C45.1 C46.1 R23.2 R24.2 SV12.1 U12.15 U12.16 U12.17 U12.18
VDD12: C49.1 C50.1 R25.2 R26.2 SV13.1 U13.15 U13.16 U13.17 U13.18
VDD13: C53.1 C54.1 R27.2 R28.2 SV14.1 U14.15 U14.16 U14.17 U14.18
VDD14: C57.1 C58.1 R29.2 R30.2 SV15.1 U15.15 U15.16 U15.17 U15.18
VDD15: C61.1 C62.1 R31.2 R32.2 SV16.1 U16.15 U16.16 U16.17 U16.18
VDD16: C65.1 C66.1 R33.2 R34.2 SV17.1 U17.15 U17.16 U17.17 U17.18
VDD17: C69.1 C70.1 R35.2 R36.2 SV18.1 U18.15 U18.16 U18.17 U18.18
VDD18: C73.1 C74.1 R37.2 R38.2 SV19.1 U19.15 U19.16 U19.17 U19.18
VDD19: C77.1 C78.1 R39.2 R40.2 SV20.1 U20.15 U20.16 U20.17 U20.18
VDD20: C81.1 C82.1 R41.2 R42.2 SV21.1 U21.15 U21.16 U21.17 U21.18
VDD21: C85.1 C86.1 R43.2 R44.2 SV22.1 U22.15 U22.16 U22.17 U22.18
VDD22: C89.1 C90.1 R45.2 R46.2 SV23.1 U23.15 U23.16 U23.17 U23.18
VDD23: C93.1 C94.1 R47.2 R48.2 SV24.1 U24.15 U24.16 U24.17 U24.18
VDD24: C97.1 C98.1 R49.2 R50.2 SV25.1 U25.15 U25.16 U25.17 U25.18
VDD25: C101.1 C102.1 R51.2 R52.2 SV26.1 U26.15 U26.16 U26.17 U26.18
VDD26: C105.1 C106.1 R53.2 R54.2 SV27.1 U27.15 U27.16 U27.17 U27.18
VDD27: C109.1 C110.1 R55.2 R56.2 SV28.1 U28.15 U28.16 U28.17 U28.18
VDD28: C113.1 C114.1 R57.2 R58.2 SV29.1 U29.15 U29.16 U29.17 U29.18
VDD29: C117.1 C118.1 R59.2 R60.2 SV30.1 U30.15 U30.16 U30.17 U30.18
VDD30: C121.1 C122.1 R61.2 R62.2 SV31.1 U31.15 U31.16 U31.17 U31.18
VDD31: C125.1 C126.1 R63.2 R64.2 SV32.1 U32.15 U32.16 U32.17 U32.18
VDD32: C129.1 C130.1 R65.2 R66.2 SV33.1 U33.15 U33.16 U33.17 U33.18
VDD33: C133.1 C134.1 R67.2 R68.2 SV34.1 U34.15 U34.16 U34.17 U34.18
VDD34: C137.1 C138.1 R69.2 R70.2 SV35.1 U35.15 U35.16 U35.17 U35.18
VDD35: C141.1 C142.1 R71.2 R72.2 SV36.1 U36.15 U36.16 U36.17 U36.18
VDD36: C145.1 C146.1 R73.2 R74.2 SV37.1 U37.15 U37.16 U37.17 U37.18
VDD37: C149.1 C150.1 R75.2 R76.2 SV38.1 U38.15 U38.16 U38.17 U38.18
VDD38: C153.1 C154.1 R77.2 R78.2 SV39.1 U39.15 U39.16 U39.17 U39.18
VDD39: C157.1 C158.1 R79.2 R80.2 SV40.1 U40.15 U40.16 U40.17 U40.18
VDD40: C161.1 C162.1 R81.2 R82.2 SV41.1 U41.15 U41.16 U41.17 U41.18
VDD41: C165.1 C166.1 R83.2 R84.2 SV42.1 U42.15 U42.16 U42.17 U42.18

## Tracks (layer width: path | path; a pad name or v marks a point on that pad's centre or on a via)
GND
  Top 0.305: U1.6 10.43,16.09 C2.1 10.93,16.15 | 10.93,16.15 11.43,16.15 | 11.43,16.15 11.93,16.15 | 11.93,16.15 12.43,16.15 | 12.43,16.15 13.61,16.15 14.78,14.99 16.22,14.99 C4.2 C3.2 19.86,15.04 20.57,15.75 SV1.4 23.75,15.75 24.69,14.81 24.69,12.5 24.13,11.94 21.11,11.94 20.66,12.38 15.77,12.38 | U1.4 11.43,16.15 | U1.3 11.93,16.15 | U1.5 10.93,16.15 | U1.2 12.43,16.15 | U1.23 15.77,12.38 | U1.22 13.97,11.89 15.77,11.89 15.77,12.38
  pour Top: 5.74,6.2 24.77,6.2 24.77,18.36 5.84,18.36 5.84,14.38 14.4,14.38 14.4,8.74 5.74,8.74
GND1
  Top 0.305: U2.6 10.33,40.58 C8.1 10.83,40.64 | 10.83,40.64 11.33,40.64 | 11.33,40.64 11.83,40.64 | 11.83,40.64 12.33,40.64 | 12.33,40.64 13.51,40.64 14.68,39.47 16.11,39.47 C5.2 C6.2 18.4,39.52 19.76,39.52 20.47,40.23 SV2.4 23.65,40.23 24.59,39.29 24.59,36.98 24.03,36.42 21.01,36.42 20.56,36.87 15.67,36.87 | U2.4 11.33,40.64 | U2.3 11.83,40.64 | U2.5 10.83,40.64 | U2.2 12.33,40.64 | U2.23 15.67,36.87 | U2.22 13.86,36.37 15.67,36.37 15.67,36.87
  pour Top: 5.64,30.68 24.66,30.68 24.66,42.85 5.74,42.85 5.74,38.86 14.3,38.86 14.3,33.22 5.64,33.22
GND2
  Top 0.305: U3.6 10.36,65.12 C12.1 10.86,65.18 | 10.86,65.18 11.36,65.18 | 11.36,65.18 11.86,65.18 | 11.86,65.18 12.36,65.18 | 12.36,65.18 13.54,65.18 14.71,64.01 16.14,64.01 C9.2 C10.2 19.79,64.06 20.5,64.77 SV3.4 23.67,64.77 24.61,63.83 24.61,61.52 24.05,60.96 21.03,60.96 20.59,61.41 15.7,61.41 | U3.4 11.36,65.18 | U3.3 11.86,65.18 | U3.5 10.86,65.18 | U3.2 12.36,65.18 | U3.23 15.7,61.41 | U3.22 13.89,60.91 15.7,60.91 15.7,61.41
  pour Top: 5.66,55.22 24.69,55.22 24.69,67.39 5.77,67.39 5.77,63.4 14.33,63.4 14.33,57.76 5.66,57.76
GND3
  Top 0.305: U4.6 41.17,16.09 C16.1 41.67,16.15 | 41.67,16.15 42.17,16.15 | 42.17,16.15 42.67,16.15 | 42.67,16.15 43.17,16.15 | 43.17,16.15 44.35,16.15 45.52,14.99 46.95,14.99 C13.2 C14.2 50.6,15.04 51.31,15.75 SV4.4 54.48,15.75 55.42,14.81 55.42,12.5 54.86,11.94 51.84,11.94 51.4,12.38 46.51,12.38 | U4.4 42.17,16.15 | U4.3 42.67,16.15 | U4.5 41.67,16.15 | U4.2 43.17,16.15 | U4.23 46.51,12.38 | U4.22 44.7,11.89 46.51,11.89 46.51,12.38
  pour Top: 36.47,6.2 55.5,6.2 55.5,18.36 36.58,18.36 36.58,14.38 45.14,14.38 45.14,8.74 36.47,8.74
GND4
  Top 0.305: U5.6 10.36,89.63 C20.1 10.86,89.69 | 10.86,89.69 11.36,89.69 | 11.36,89.69 11.86,89.69 | 11.86,89.69 12.36,89.69 | 12.36,89.69 13.54,89.69 14.71,88.52 16.14,88.52 C17.2 C18.2 19.79,88.57 20.5,89.28 SV5.4 23.67,89.28 24.61,88.34 24.61,86.03 24.05,85.47 21.03,85.47 20.59,85.92 15.7,85.92 | U5.4 11.36,89.69 | U5.3 11.86,89.69 | U5.5 10.86,89.69 | U5.2 12.36,89.69 | U5.23 15.7,85.92 | U5.22 13.89,85.42 15.7,85.42 15.7,85.92
  pour Top: 5.66,79.73 24.69,79.73 24.69,91.9 5.77,91.9 5.77,87.91 14.33,87.91 14.33,82.27 5.66,82.27
GND5
  Top 0.305: U6.6 10.33,114.72 C24.1 10.83,114.78 | 10.83,114.78 11.33,114.78 | 11.33,114.78 11.83,114.78 | 11.83,114.78 12.33,114.78 | 12.33,114.78 13.51,114.78 14.68,113.61 16.11,113.61 C21.2 C22.2 18.4,113.67 19.76,113.67 20.47,114.38 SV6.4 23.65,114.38 24.59,113.44 24.59,111.13 24.03,110.57 21.01,110.57 20.56,111.01 15.67,111.01 | U6.4 11.33,114.78 | U6.3 11.83,114.78 | U6.5 10.83,114.78 | U6.2 12.33,114.78 | U6.23 15.67,111.01 | U6.22 13.86,110.52 15.67,110.52 15.67,111.01
  pour Top: 5.64,104.83 24.66,104.83 24.66,116.99 5.74,116.99 5.74,113 14.3,113 14.3,107.37 5.64,107.37
GND6
  Top 0.305: U7.6 41.07,40.58 C28.1 41.57,40.64 | 41.57,40.64 42.07,40.64 | 42.07,40.64 42.57,40.64 | 42.57,40.64 43.07,40.64 | 43.07,40.64 44.25,40.64 45.42,39.47 46.85,39.47 C25.2 C26.2 50.5,39.52 51.21,40.23 SV7.4 54.38,40.23 55.32,39.29 55.32,36.98 54.76,36.42 51.74,36.42 51.29,36.87 46.41,36.87 | U7.4 42.07,40.64 | U7.3 42.57,40.64 | U7.5 41.57,40.64 | U7.2 43.07,40.64 | U7.23 46.41,36.87 | U7.22 44.6,36.37 46.41,36.37 46.41,36.87
  pour Top: 36.37,30.68 55.4,30.68 55.4,42.85 36.47,42.85 36.47,38.86 45.03,38.86 45.03,33.22 36.37,33.22
GND7
  Top 0.305: U8.6 41.09,65.12 C32.1 41.59,65.18 | 41.59,65.18 42.09,65.18 | 42.09,65.18 42.59,65.18 | 42.59,65.18 43.09,65.18 | 43.09,65.18 44.27,65.18 45.44,64.01 46.87,64.01 C29.2 C30.2 49.16,64.06 50.52,64.06 51.23,64.77 SV8.4 54.41,64.77 55.35,63.83 55.35,61.52 54.79,60.96 51.77,60.96 51.32,61.41 46.43,61.41 | U8.4 42.09,65.18 | U8.3 42.59,65.18 | U8.5 41.59,65.18 | U8.2 43.09,65.18 | U8.23 46.43,61.41 | U8.22 44.62,60.91 46.43,60.91 46.43,61.41
  pour Top: 36.4,55.22 55.42,55.22 55.42,67.39 36.5,67.39 36.5,63.4 45.06,63.4 45.06,57.76 36.4,57.76
GND8
  Top 0.305: U9.6 41.09,89.63 C36.1 41.59,89.69 | 41.59,89.69 42.09,89.69 | 42.09,89.69 42.59,89.69 | 42.59,89.69 43.09,89.69 | 43.09,89.69 44.27,89.69 45.44,88.52 46.87,88.52 C33.2 C34.2 49.16,88.57 50.52,88.57 51.23,89.28 SV9.4 54.41,89.28 55.35,88.34 55.35,86.03 54.79,85.47 51.77,85.47 51.32,85.92 46.43,85.92 | U9.4 42.09,89.69 | U9.3 42.59,89.69 | U9.5 41.59,89.69 | U9.2 43.09,89.69 | U9.23 46.43,85.92 | U9.22 44.62,85.42 46.43,85.42 46.43,85.92
  pour Top: 36.4,79.73 55.42,79.73 55.42,91.9 36.5,91.9 36.5,87.91 45.06,87.91 45.06,82.27 36.4,82.27
GND9
  Top 0.305: U10.6 41.07,114.72 C40.1 41.57,114.78 | 41.57,114.78 42.07,114.78 | 42.07,114.78 42.57,114.78 | 42.57,114.78 43.07,114.78 | 43.07,114.78 44.25,114.78 45.42,113.61 46.85,113.61 C37.2 C38.2 49.13,113.67 50.5,113.67 51.21,114.38 SV10.4 54.38,114.38 55.32,113.44 55.32,111.13 54.76,110.57 51.74,110.57 51.29,111.01 46.41,111.01 | U10.4 42.07,114.78 | U10.3 42.57,114.78 | U10.5 41.57,114.78 | U10.2 43.07,114.78 | U10.23 46.41,111.01 | U10.22 44.6,110.52 46.41,110.52 46.41,111.01
  pour Top: 36.37,104.83 55.4,104.83 55.4,116.99 36.47,116.99 36.47,113 45.03,113 45.03,107.37 36.37,107.37
GND10
  Top 0.305: U11.6 41.02,139.28 C44.1 41.52,139.34 | 41.52,139.34 42.02,139.34 | 42.02,139.34 42.52,139.34 | 42.52,139.34 43.02,139.34 | 43.02,139.34 44.2,139.34 45.36,138.18 46.8,138.18 C41.2 C42.2 50.44,138.23 51.16,138.94 SV11.4 54.33,138.94 55.27,138 55.27,135.69 54.71,135.13 51.69,135.13 51.24,135.57 46.36,135.57 | U11.4 42.02,139.34 | U11.3 42.52,139.34 | U11.5 41.52,139.34 | U11.2 43.02,139.34 | U11.23 46.36,135.57 | U11.22 44.55,135.08 46.36,135.08 46.36,135.57
  pour Top: 36.32,129.39 55.35,129.39 55.35,141.55 36.42,141.55 36.42,137.57 44.98,137.57 44.98,131.93 36.32,131.93
GND11
  Top 0.305: U12.6 71.83,16.09 C48.1 72.33,16.15 | 72.33,16.15 72.83,16.15 | 72.83,16.15 73.33,16.15 | 73.33,16.15 73.83,16.15 | 73.83,16.15 75.01,16.15 76.17,14.99 77.61,14.99 C45.2 C46.2 81.25,15.04 81.97,15.75 SV12.4 85.14,15.75 86.08,14.81 86.08,12.5 85.52,11.94 82.5,11.94 82.05,12.38 77.17,12.38 | U12.4 72.83,16.15 | U12.3 73.33,16.15 | U12.5 72.33,16.15 | U12.2 73.83,16.15 | U12.23 77.17,12.38 | U12.22 75.36,11.89 77.17,11.89 77.17,12.38
  pour Top: 67.13,6.2 86.16,6.2 86.16,18.36 67.23,18.36 67.23,14.38 75.79,14.38 75.79,8.74 67.13,8.74
GND12
  Top 0.305: U13.6 71.72,40.58 C52.1 72.22,40.64 | 72.22,40.64 72.72,40.64 | 72.72,40.64 73.22,40.64 | 73.22,40.64 73.72,40.64 | 73.72,40.64 74.9,40.64 76.07,39.47 77.51,39.47 C49.2 C50.2 81.15,39.52 81.86,40.23 SV13.4 85.04,40.23 85.98,39.29 85.98,36.98 85.42,36.42 82.4,36.42 81.95,36.87 77.06,36.87 | U13.4 72.72,40.64 | U13.3 73.22,40.64 | U13.5 72.22,40.64 | U13.2 73.72,40.64 | U13.23 77.06,36.87 | U13.22 75.26,36.37 77.06,36.37 77.06,36.87
  pour Top: 67.03,30.68 86.06,30.68 86.06,42.85 67.13,42.85 67.13,38.86 75.69,38.86 75.69,33.22 67.03,33.22
GND13
  Top 0.305: U14.6 71.75,65.12 C56.1 72.25,65.18 | 72.25,65.18 72.75,65.18 | 72.75,65.18 73.25,65.18 | 73.25,65.18 73.75,65.18 | 73.75,65.18 74.93,65.18 76.1,64.01 77.53,64.01 C53.2 C54.2 79.82,64.06 81.18,64.06 81.89,64.77 SV14.4 85.06,64.77 86,63.83 86,61.52 85.45,60.96 82.42,60.96 81.98,61.41 77.09,61.41 | U14.4 72.75,65.18 | U14.3 73.25,65.18 | U14.5 72.25,65.18 | U14.2 73.75,65.18 | U14.23 77.09,61.41 | U14.22 75.28,60.91 77.09,60.91 77.09,61.41
  pour Top: 67.06,55.22 86.08,55.22 86.08,67.39 67.16,67.39 67.16,63.4 75.72,63.4 75.72,57.76 67.06,57.76
GND14
  Top 0.305: U15.6 71.75,89.63 C60.1 72.25,89.69 | 72.25,89.69 72.75,89.69 | 72.75,89.69 73.25,89.69 | 73.25,89.69 73.75,89.69 | 73.75,89.69 74.93,89.69 76.1,88.52 77.53,88.52 C57.2 C58.2 79.82,88.57 81.18,88.57 81.89,89.28 SV15.4 85.06,89.28 86,88.34 86,86.03 85.45,85.47 82.42,85.47 81.98,85.92 77.09,85.92 | U15.4 72.75,89.69 | U15.3 73.25,89.69 | U15.5 72.25,89.69 | U15.2 73.75,89.69 | U15.23 77.09,85.92 | U15.22 75.28,85.42 77.09,85.42 77.09,85.92
  pour Top: 67.06,79.73 86.08,79.73 86.08,91.9 67.16,91.9 67.16,87.91 75.72,87.91 75.72,82.27 67.06,82.27
GND15
  Top 0.305: U16.6 10.28,139.28 C64.1 10.78,139.34 | 10.78,139.34 11.28,139.34 | 11.28,139.34 11.78,139.34 | 11.78,139.34 12.28,139.34 | 12.28,139.34 13.46,139.34 14.63,138.18 16.06,138.18 C61.2 C62.2 18.35,138.23 19.71,138.23 20.42,138.94 SV16.4 23.6,138.94 24.54,138 24.54,135.69 23.98,135.13 20.96,135.13 20.51,135.57 15.62,135.57 | U16.4 11.28,139.34 | U16.3 11.78,139.34 | U16.5 10.78,139.34 | U16.2 12.28,139.34 | U16.23 15.62,135.57 | U16.22 13.81,135.08 15.62,135.08 15.62,135.57
  pour Top: 5.59,129.39 24.61,129.39 24.61,141.55 5.69,141.55 5.69,137.57 14.25,137.57 14.25,131.93 5.59,131.93
GND16
  Top 0.305: U17.6 71.72,114.72 C68.1 72.22,114.78 | 72.22,114.78 72.72,114.78 | 72.72,114.78 73.22,114.78 | 73.22,114.78 73.72,114.78 | 73.72,114.78 74.9,114.78 76.07,113.61 77.51,113.61 C65.2 C66.2 79.79,113.67 81.15,113.67 81.86,114.38 SV17.4 85.04,114.38 85.98,113.44 85.98,111.13 85.42,110.57 82.4,110.57 81.95,111.01 77.06,111.01 | U17.4 72.72,114.78 | U17.3 73.22,114.78 | U17.5 72.22,114.78 | U17.2 73.72,114.78 | U17.23 77.06,111.01 | U17.22 75.26,110.52 77.06,110.52 77.06,111.01
  pour Top: 67.03,104.83 86.06,104.83 86.06,116.99 67.13,116.99 67.13,113 75.69,113 75.69,107.37 67.03,107.37
GND17
  Top 0.305: U18.6 71.67,139.28 C72.1 72.17,139.34 | 72.17,139.34 72.67,139.34 | 72.67,139.34 73.17,139.34 | 73.17,139.34 73.67,139.34 | 73.67,139.34 74.85,139.34 76.02,138.18 77.46,138.18 C69.2 C70.2 81.1,138.23 81.81,138.94 SV18.4 84.99,138.94 85.93,138 85.93,135.69 85.37,135.13 82.35,135.13 81.9,135.57 77.01,135.57 | U18.4 72.67,139.34 | U18.3 73.17,139.34 | U18.5 72.17,139.34 | U18.2 73.67,139.34 | U18.23 77.01,135.57 | U18.22 75.21,135.08 77.01,135.08 77.01,135.57
  pour Top: 66.98,129.39 86,129.39 86,141.55 67.08,141.55 67.08,137.57 75.64,137.57 75.64,131.93 66.98,131.93
GND18
  Top 0.305: U19.6 102.56,16.09 C76.1 103.06,16.15 | 103.06,16.15 103.56,16.15 | 103.56,16.15 104.06,16.15 | 104.06,16.15 104.56,16.15 | 104.56,16.15 105.74,16.15 106.91,14.99 108.34,14.99 C73.2 C74.2 110.63,15.04 111.99,15.04 112.7,15.75 SV19.4 115.88,15.75 116.81,14.81 116.81,12.5 116.26,11.94 113.23,11.94 112.79,12.38 107.9,12.38 | U19.4 103.56,16.15 | U19.3 104.06,16.15 | U19.5 103.06,16.15 | U19.2 104.56,16.15 | U19.23 107.9,12.38 | U19.22 106.09,11.89 107.9,11.89 107.9,12.38
  pour Top: 97.87,6.2 116.89,6.2 116.89,18.36 97.97,18.36 97.97,14.38 106.53,14.38 106.53,8.74 97.87,8.74
GND19
  Top 0.305: U20.6 102.46,40.58 C80.1 102.96,40.64 | 102.96,40.64 103.46,40.64 | 103.46,40.64 103.96,40.64 | 103.96,40.64 104.46,40.64 | 104.46,40.64 105.64,40.64 106.81,39.47 108.24,39.47 C77.2 C78.2 111.89,39.52 112.6,40.23 SV20.4 115.77,40.23 116.71,39.29 116.71,36.98 116.15,36.42 113.13,36.42 112.69,36.87 107.8,36.87 | U20.4 103.46,40.64 | U20.3 103.96,40.64 | U20.5 102.96,40.64 | U20.2 104.46,40.64 | U20.23 107.8,36.87 | U20.22 105.99,36.37 107.8,36.37 107.8,36.87
  pour Top: 97.76,30.68 116.79,30.68 116.79,42.85 97.87,42.85 97.87,38.86 106.43,38.86 106.43,33.22 97.76,33.22
GND20
  Top 0.305: U21.6 102.48,65.12 C84.1 102.98,65.18 | 102.98,65.18 103.48,65.18 | 103.48,65.18 103.98,65.18 | 103.98,65.18 104.48,65.18 | 104.48,65.18 105.66,65.18 106.83,64.01 108.27,64.01 C81.2 C82.2 111.91,64.06 112.62,64.77 SV21.4 115.8,64.77 116.74,63.83 116.74,61.52 116.18,60.96 113.16,60.96 112.71,61.41 107.82,61.41 | U21.4 103.48,65.18 | U21.3 103.98,65.18 | U21.5 102.98,65.18 | U21.2 104.48,65.18 | U21.23 107.82,61.41 | U21.22 106.02,60.91 107.82,60.91 107.82,61.41
  pour Top: 97.79,55.22 116.81,55.22 116.81,67.39 97.89,67.39 97.89,63.4 106.45,63.4 106.45,57.76 97.79,57.76
GND21
  Top 0.305: U22.6 102.48,89.63 C88.1 102.98,89.69 | 102.98,89.69 103.48,89.69 | 103.48,89.69 103.98,89.69 | 103.98,89.69 104.48,89.69 | 104.48,89.69 105.66,89.69 106.83,88.52 108.27,88.52 C85.2 C86.2 111.91,88.57 112.62,89.28 SV22.4 115.8,89.28 116.74,88.34 116.74,86.03 116.18,85.47 113.16,85.47 112.71,85.92 107.82,85.92 | U22.4 103.48,89.69 | U22.3 103.98,89.69 | U22.5 102.98,89.69 | U22.2 104.48,89.69 | U22.23 107.82,85.92 | U22.22 106.02,85.42 107.82,85.42 107.82,85.92
  pour Top: 97.79,79.73 116.81,79.73 116.81,91.9 97.89,91.9 97.89,87.91 106.45,87.91 106.45,82.27 97.79,82.27
GND22
  Top 0.305: U23.6 102.46,114.72 C92.1 102.96,114.78 | 102.96,114.78 103.46,114.78 | 103.46,114.78 103.96,114.78 | 103.96,114.78 104.46,114.78 | 104.46,114.78 105.64,114.78 106.81,113.61 108.24,113.61 C89.2 C90.2 110.53,113.67 111.89,113.67 112.6,114.38 SV23.4 115.77,114.38 116.71,113.44 116.71,111.13 116.15,110.57 113.13,110.57 112.69,111.01 107.8,111.01 | U23.4 103.46,114.78 | U23.3 103.96,114.78 | U23.5 102.96,114.78 | U23.2 104.46,114.78 | U23.23 107.8,111.01 | U23.22 105.99,110.52 107.8,110.52 107.8,111.01
  pour Top: 97.76,104.83 116.79,104.83 116.79,116.99 97.87,116.99 97.87,113 106.43,113 106.43,107.37 97.76,107.37
GND23
  Top 0.305: U24.6 102.41,139.28 C96.1 102.91,139.34 | 102.91,139.34 103.41,139.34 | 103.41,139.34 103.91,139.34 | 103.91,139.34 104.41,139.34 | 104.41,139.34 105.59,139.34 106.76,138.18 108.19,138.18 C93.2 C94.2 111.84,138.23 112.55,138.94 SV24.4 115.72,138.94 116.66,138 116.66,135.69 116.1,135.13 113.08,135.13 112.64,135.57 107.75,135.57 | U24.4 103.41,139.34 | U24.3 103.91,139.34 | U24.5 102.91,139.34 | U24.2 104.41,139.34 | U24.23 107.75,135.57 | U24.22 105.94,135.08 107.75,135.08 107.75,135.57
  pour Top: 97.71,129.39 116.74,129.39 116.74,141.55 97.82,141.55 97.82,137.57 106.38,137.57 106.38,131.93 97.71,131.93
GND24
  Top 0.305: U25.6 133.32,16.09 C100.1 133.82,16.15 | 133.82,16.15 134.32,16.15 | 134.32,16.15 134.82,16.15 | 134.82,16.15 135.32,16.15 | 135.32,16.15 136.5,16.15 137.67,14.99 139.1,14.99 C97.2 C98.2 141.39,15.04 142.75,15.04 143.46,15.75 SV25.4 146.63,15.75 147.57,14.81 147.57,12.5 147.02,11.94 143.99,11.94 143.55,12.38 138.66,12.38 | U25.4 134.32,16.15 | U25.3 134.82,16.15 | U25.5 133.82,16.15 | U25.2 135.32,16.15 | U25.23 138.66,12.38 | U25.22 136.85,11.89 138.66,11.89 138.66,12.38
  pour Top: 128.63,6.2 147.65,6.2 147.65,18.36 128.73,18.36 128.73,14.38 137.29,14.38 137.29,8.74 128.63,8.74
GND25
  Top 0.305: U26.6 133.22,40.58 C104.1 133.72,40.64 | 133.72,40.64 134.22,40.64 | 134.22,40.64 134.72,40.64 | 134.72,40.64 135.22,40.64 | 135.22,40.64 136.4,40.64 137.57,39.47 139,39.47 C101.2 C102.2 142.65,39.52 143.36,40.23 SV26.4 146.53,40.23 147.47,39.29 147.47,36.98 146.91,36.42 143.89,36.42 143.45,36.87 138.56,36.87 | U26.4 134.22,40.64 | U26.3 134.72,40.64 | U26.5 133.72,40.64 | U26.2 135.22,40.64 | U26.23 138.56,36.87 | U26.22 136.75,36.37 138.56,36.37 138.56,36.87
  pour Top: 128.52,30.68 147.55,30.68 147.55,42.85 128.63,42.85 128.63,38.86 137.19,38.86 137.19,33.22 128.52,33.22
GND26
  Top 0.305: U27.6 133.24,65.12 C108.1 133.74,65.18 | 133.74,65.18 134.24,65.18 | 134.24,65.18 134.74,65.18 | 134.74,65.18 135.24,65.18 | 135.24,65.18 136.42,65.18 137.59,64.01 139.02,64.01 C105.2 C106.2 141.31,64.06 142.67,64.06 143.38,64.77 SV27.4 146.56,64.77 147.5,63.83 147.5,61.52 146.94,60.96 143.92,60.96 143.47,61.41 138.58,61.41 | U27.4 134.24,65.18 | U27.3 134.74,65.18 | U27.5 133.74,65.18 | U27.2 135.24,65.18 | U27.23 138.58,61.41 | U27.22 136.77,60.91 138.58,60.91 138.58,61.41
  pour Top: 128.55,55.22 147.57,55.22 147.57,67.39 128.65,67.39 128.65,63.4 137.21,63.4 137.21,57.76 128.55,57.76
GND27
  Top 0.305: U28.6 133.24,89.63 C112.1 133.74,89.69 | 133.74,89.69 134.24,89.69 | 134.24,89.69 134.74,89.69 | 134.74,89.69 135.24,89.69 | 135.24,89.69 136.42,89.69 137.59,88.52 139.02,88.52 C109.2 C110.2 141.31,88.57 142.67,88.57 143.38,89.28 SV28.4 146.56,89.28 147.5,88.34 147.5,86.03 146.94,85.47 143.92,85.47 143.47,85.92 138.58,85.92 | U28.4 134.24,89.69 | U28.3 134.74,89.69 | U28.5 133.74,89.69 | U28.2 135.24,89.69 | U28.23 138.58,85.92 | U28.22 136.77,85.42 138.58,85.42 138.58,85.92
  pour Top: 128.55,79.73 147.57,79.73 147.57,91.9 128.65,91.9 128.65,87.91 137.21,87.91 137.21,82.27 128.55,82.27
GND28
  Top 0.305: U29.6 133.22,114.72 C116.1 133.72,114.78 | 133.72,114.78 134.22,114.78 | 134.22,114.78 134.72,114.78 | 134.72,114.78 135.22,114.78 | 135.22,114.78 136.4,114.78 137.57,113.61 139,113.61 C113.2 C114.2 141.29,113.67 142.65,113.67 143.36,114.38 SV29.4 146.53,114.38 147.47,113.44 147.47,111.13 146.91,110.57 143.89,110.57 143.45,111.01 138.56,111.01 | U29.4 134.22,114.78 | U29.3 134.72,114.78 | U29.5 133.72,114.78 | U29.2 135.22,114.78 | U29.23 138.56,111.01 | U29.22 136.75,110.52 138.56,110.52 138.56,111.01
  pour Top: 128.52,104.83 147.55,104.83 147.55,116.99 128.63,116.99 128.63,113 137.19,113 137.19,107.37 128.52,107.37
GND29
  Top 0.305: U30.6 133.17,139.28 C120.1 133.67,139.34 | 133.67,139.34 134.17,139.34 | 134.17,139.34 134.67,139.34 | 134.67,139.34 135.17,139.34 | 135.17,139.34 136.35,139.34 137.52,138.18 138.95,138.18 C117.2 C118.2 142.6,138.23 143.31,138.94 SV30.4 146.48,138.94 147.42,138 147.42,135.69 146.86,135.13 143.84,135.13 143.4,135.57 138.51,135.57 | U30.4 134.17,139.34 | U30.3 134.67,139.34 | U30.5 133.67,139.34 | U30.2 135.17,139.34 | U30.23 138.51,135.57 | U30.22 136.7,135.08 138.51,135.08 138.51,135.57
  pour Top: 128.47,129.39 147.5,129.39 147.5,141.55 128.57,141.55 128.57,137.57 137.13,137.57 137.13,131.93 128.47,131.93
GND30
  Top 0.305: U31.6 163.98,16.09 C124.1 164.48,16.15 | 164.48,16.15 164.98,16.15 | 164.98,16.15 165.48,16.15 | 165.48,16.15 165.98,16.15 | 165.98,16.15 167.16,16.15 168.33,14.99 169.76,14.99 C121.2 C122.2 173.41,15.04 174.12,15.75 SV31.4 177.29,15.75 178.23,14.81 178.23,12.5 177.67,11.94 174.65,11.94 174.21,12.38 169.32,12.38 | U31.4 164.98,16.15 | U31.3 165.48,16.15 | U31.5 164.48,16.15 | U31.2 165.98,16.15 | U31.23 169.32,12.38 | U31.22 167.51,11.89 169.32,11.89 169.32,12.38
  pour Top: 159.28,6.2 178.31,6.2 178.31,18.36 159.38,18.36 159.38,14.38 167.94,14.38 167.94,8.74 159.28,8.74
GND31
  Top 0.305: U32.6 163.88,40.58 C128.1 164.38,40.64 | 164.38,40.64 164.88,40.64 | 164.88,40.64 165.38,40.64 | 165.38,40.64 165.88,40.64 | 165.88,40.64 167.06,40.64 168.22,39.47 169.66,39.47 C125.2 C126.2 173.3,39.52 174.02,40.23 SV32.4 177.19,40.23 178.13,39.29 178.13,36.98 177.57,36.42 174.55,36.42 174.1,36.87 169.22,36.87 | U32.4 164.88,40.64 | U32.3 165.38,40.64 | U32.5 164.38,40.64 | U32.2 165.88,40.64 | U32.23 169.22,36.87 | U32.22 167.41,36.37 169.22,36.37 169.22,36.87
  pour Top: 159.18,30.68 178.21,30.68 178.21,42.85 159.28,42.85 159.28,38.86 167.84,38.86 167.84,33.22 159.18,33.22
GND32
  Top 0.305: U33.6 163.9,65.12 C132.1 164.4,65.18 | 164.4,65.18 164.9,65.18 | 164.9,65.18 165.4,65.18 | 165.4,65.18 165.9,65.18 | 165.9,65.18 167.08,65.18 168.25,64.01 169.68,64.01 C129.2 C130.2 171.97,64.06 173.33,64.06 174.04,64.77 SV33.4 177.22,64.77 178.16,63.83 178.16,61.52 177.6,60.96 174.57,60.96 174.13,61.41 169.24,61.41 | U33.4 164.9,65.18 | U33.3 165.4,65.18 | U33.5 164.4,65.18 | U33.2 165.9,65.18 | U33.23 169.24,61.41 | U33.22 167.43,60.91 169.24,60.91 169.24,61.41
  pour Top: 159.21,55.22 178.23,55.22 178.23,67.39 159.31,67.39 159.31,63.4 167.87,63.4 167.87,57.76 159.21,57.76
GND33
  Top 0.305: U34.6 163.9,89.63 C136.1 164.4,89.69 | 164.4,89.69 164.9,89.69 | 164.9,89.69 165.4,89.69 | 165.4,89.69 165.9,89.69 | 165.9,89.69 167.08,89.69 168.25,88.52 169.68,88.52 C133.2 C134.2 171.97,88.57 173.33,88.57 174.04,89.28 SV34.4 177.22,89.28 178.16,88.34 178.16,86.03 177.6,85.47 174.57,85.47 174.13,85.92 169.24,85.92 | U34.4 164.9,89.69 | U34.3 165.4,89.69 | U34.5 164.4,89.69 | U34.2 165.9,89.69 | U34.23 169.24,85.92 | U34.22 167.43,85.42 169.24,85.42 169.24,85.92
  pour Top: 159.21,79.73 178.23,79.73 178.23,91.9 159.31,91.9 159.31,87.91 167.87,87.91 167.87,82.27 159.21,82.27
GND34
  Top 0.305: U35.6 163.88,114.72 C140.1 164.38,114.78 | 164.38,114.78 164.88,114.78 | 164.88,114.78 165.38,114.78 | 165.38,114.78 165.88,114.78 | 165.88,114.78 167.06,114.78 168.22,113.61 169.66,113.61 C137.2 C138.2 171.94,113.67 173.3,113.67 174.02,114.38 SV35.4 177.19,114.38 178.13,113.44 178.13,111.13 177.57,110.57 174.55,110.57 174.1,111.01 169.22,111.01 | U35.4 164.88,114.78 | U35.3 165.38,114.78 | U35.5 164.38,114.78 | U35.2 165.88,114.78 | U35.23 169.22,111.01 | U35.22 167.41,110.52 169.22,110.52 169.22,111.01
  pour Top: 159.18,104.83 178.21,104.83 178.21,116.99 159.28,116.99 159.28,113 167.84,113 167.84,107.37 159.18,107.37
GND35
  Top 0.305: U36.6 163.82,139.28 C144.1 164.32,139.34 | 164.32,139.34 164.82,139.34 | 164.82,139.34 165.32,139.34 | 165.32,139.34 165.82,139.34 | 165.82,139.34 167.01,139.34 168.17,138.18 169.61,138.18 C141.2 C142.2 173.25,138.23 173.96,138.94 SV36.4 177.14,138.94 178.08,138 178.08,135.69 177.52,135.13 174.5,135.13 174.05,135.57 169.16,135.57 | U36.4 164.82,139.34 | U36.3 165.32,139.34 | U36.5 164.32,139.34 | U36.2 165.82,139.34 | U36.23 169.16,135.57 | U36.22 167.36,135.08 169.16,135.08 169.16,135.57
  pour Top: 159.13,129.39 178.16,129.39 178.16,141.55 159.23,141.55 159.23,137.57 167.79,137.57 167.79,131.93 159.13,131.93
GND36
  Top 0.305: U37.6 194.71,16.09 C148.1 195.21,16.15 | 195.21,16.15 195.71,16.15 | 195.71,16.15 196.21,16.15 | 196.21,16.15 196.71,16.15 | 196.71,16.15 197.89,16.15 199.06,14.99 200.49,14.99 C145.2 C146.2 202.78,15.04 204.14,15.04 204.85,15.75 SV37.4 208.03,15.75 208.97,14.81 208.97,12.5 208.41,11.94 205.38,11.94 204.94,12.38 200.05,12.38 | U37.4 195.71,16.15 | U37.3 196.21,16.15 | U37.5 195.21,16.15 | U37.2 196.71,16.15 | U37.23 200.05,12.38 | U37.22 198.24,11.89 200.05,11.89 200.05,12.38
  pour Top: 190.02,6.2 209.04,6.2 209.04,18.36 190.12,18.36 190.12,14.38 198.68,14.38 198.68,8.74 190.02,8.74
GND37